# Altium PCB PCBUL.PcbDoc (part 1 of 2)
Units mil, origin at the board's own origin, x right, y up, seen from the top; angles counter-clockwise.
Board outline 2874.31 x 3937.01 mil, 2 copper layers (Top Layer, Bottom Layer); 201 components, 228 nets, 805 pads, 341 vias.
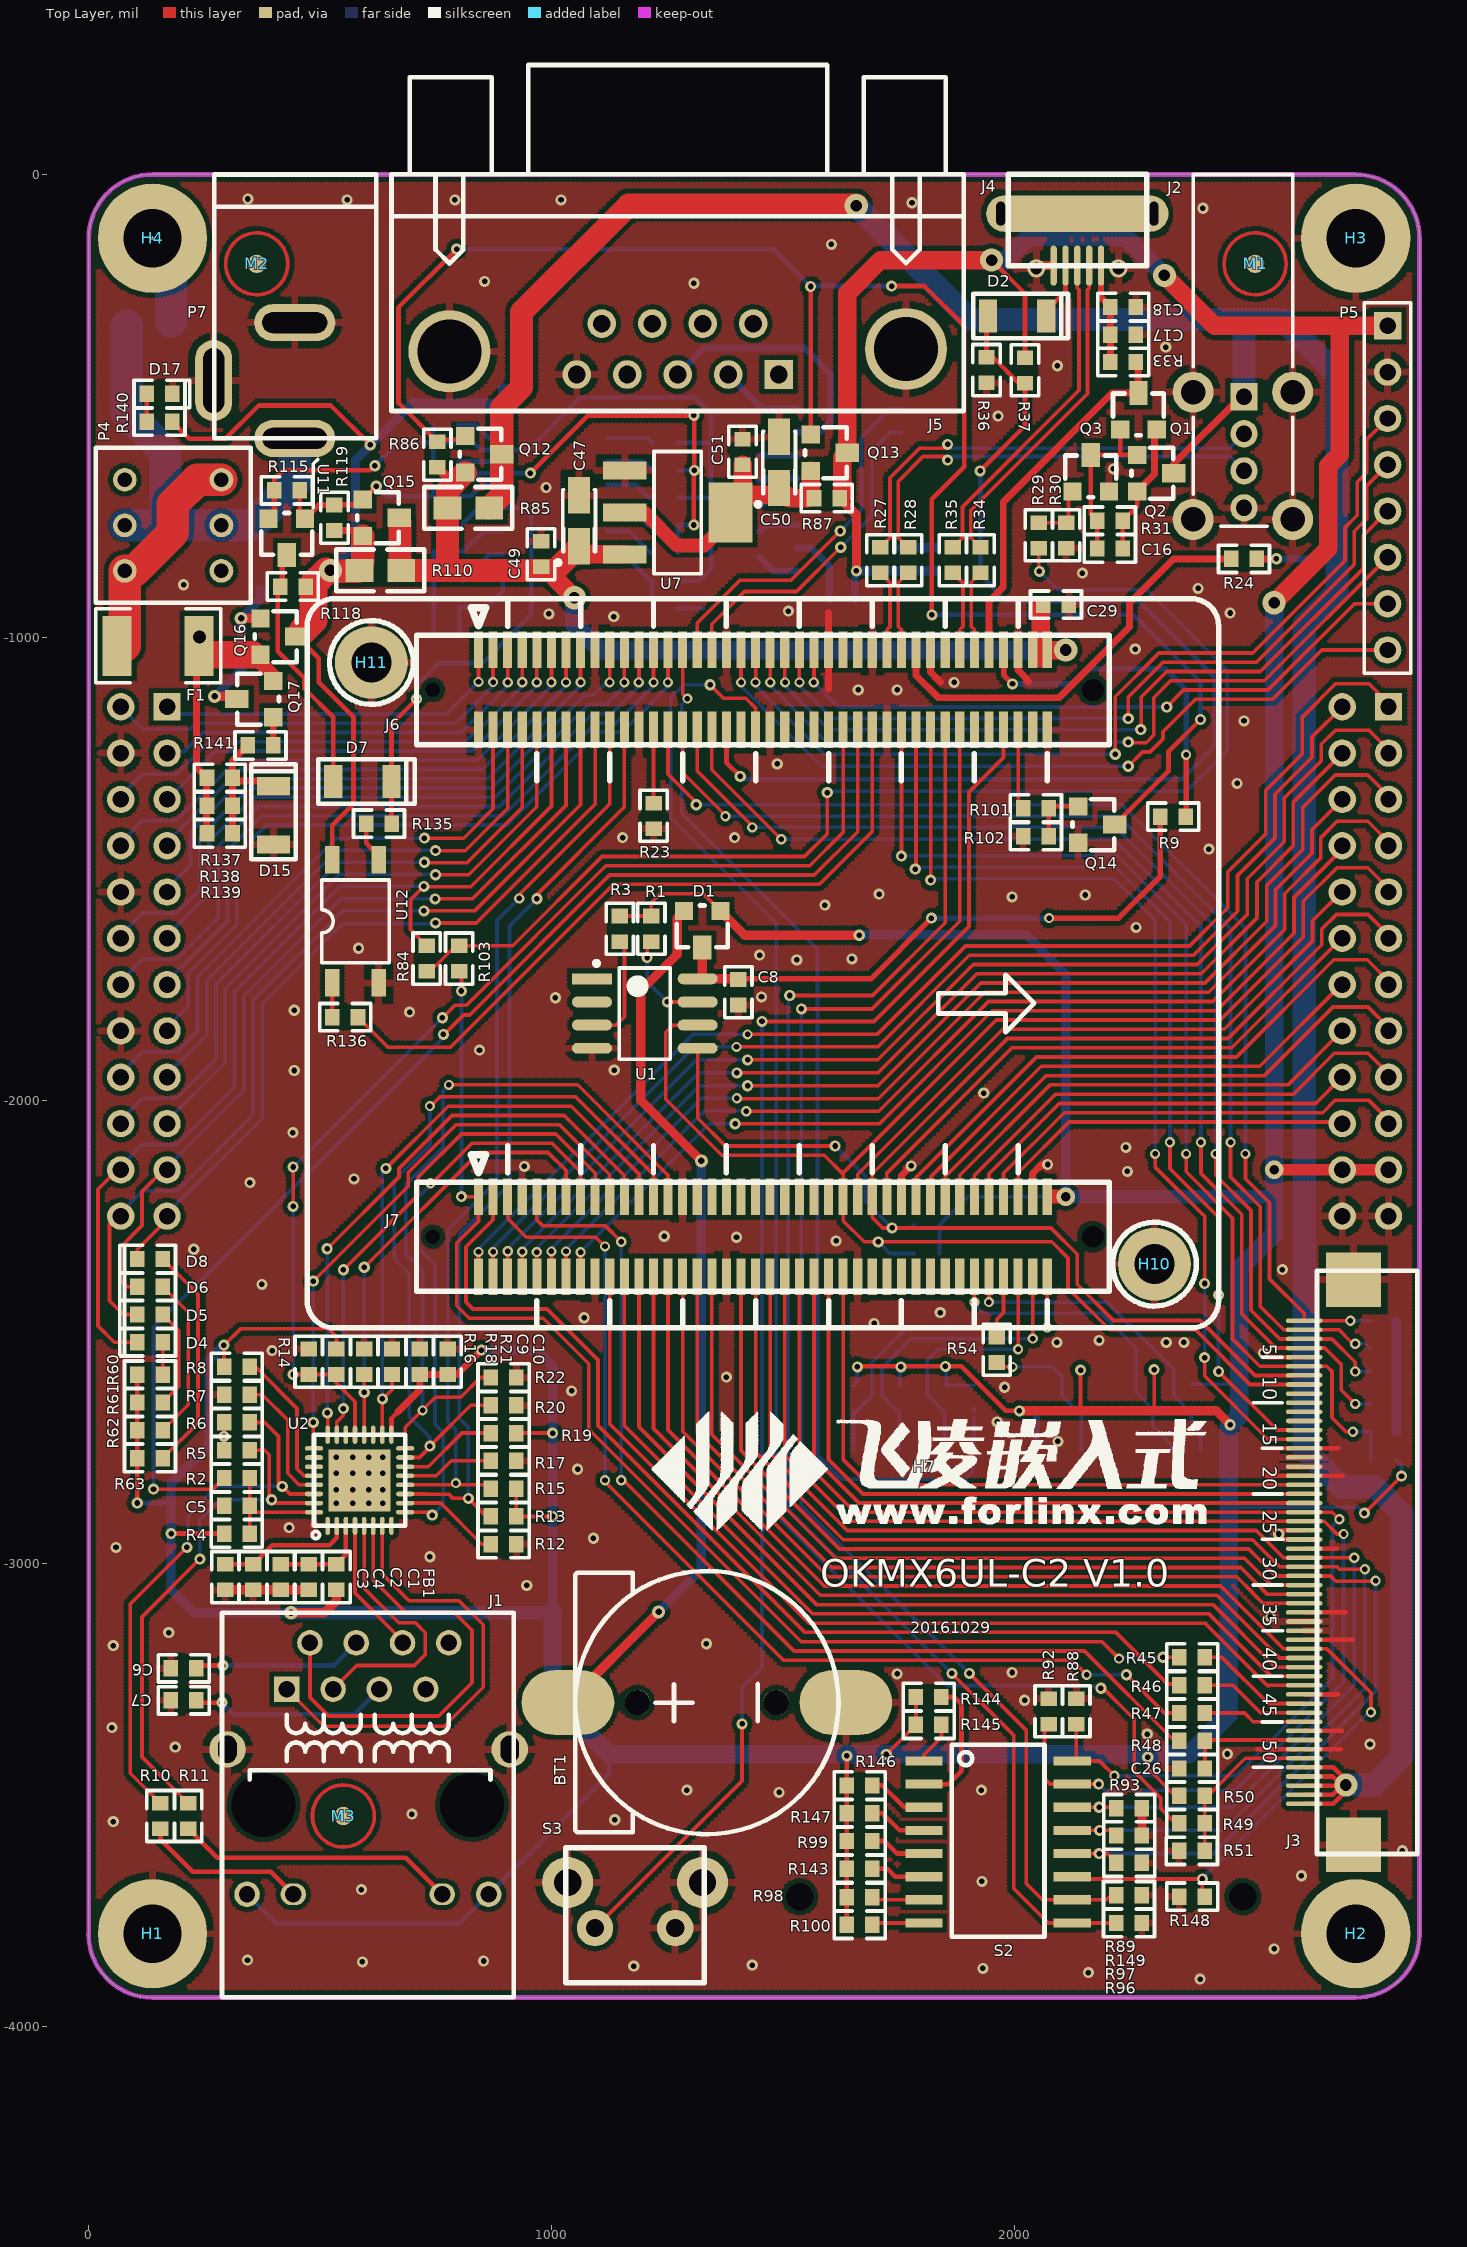
[diagram p0: Top Layer view]
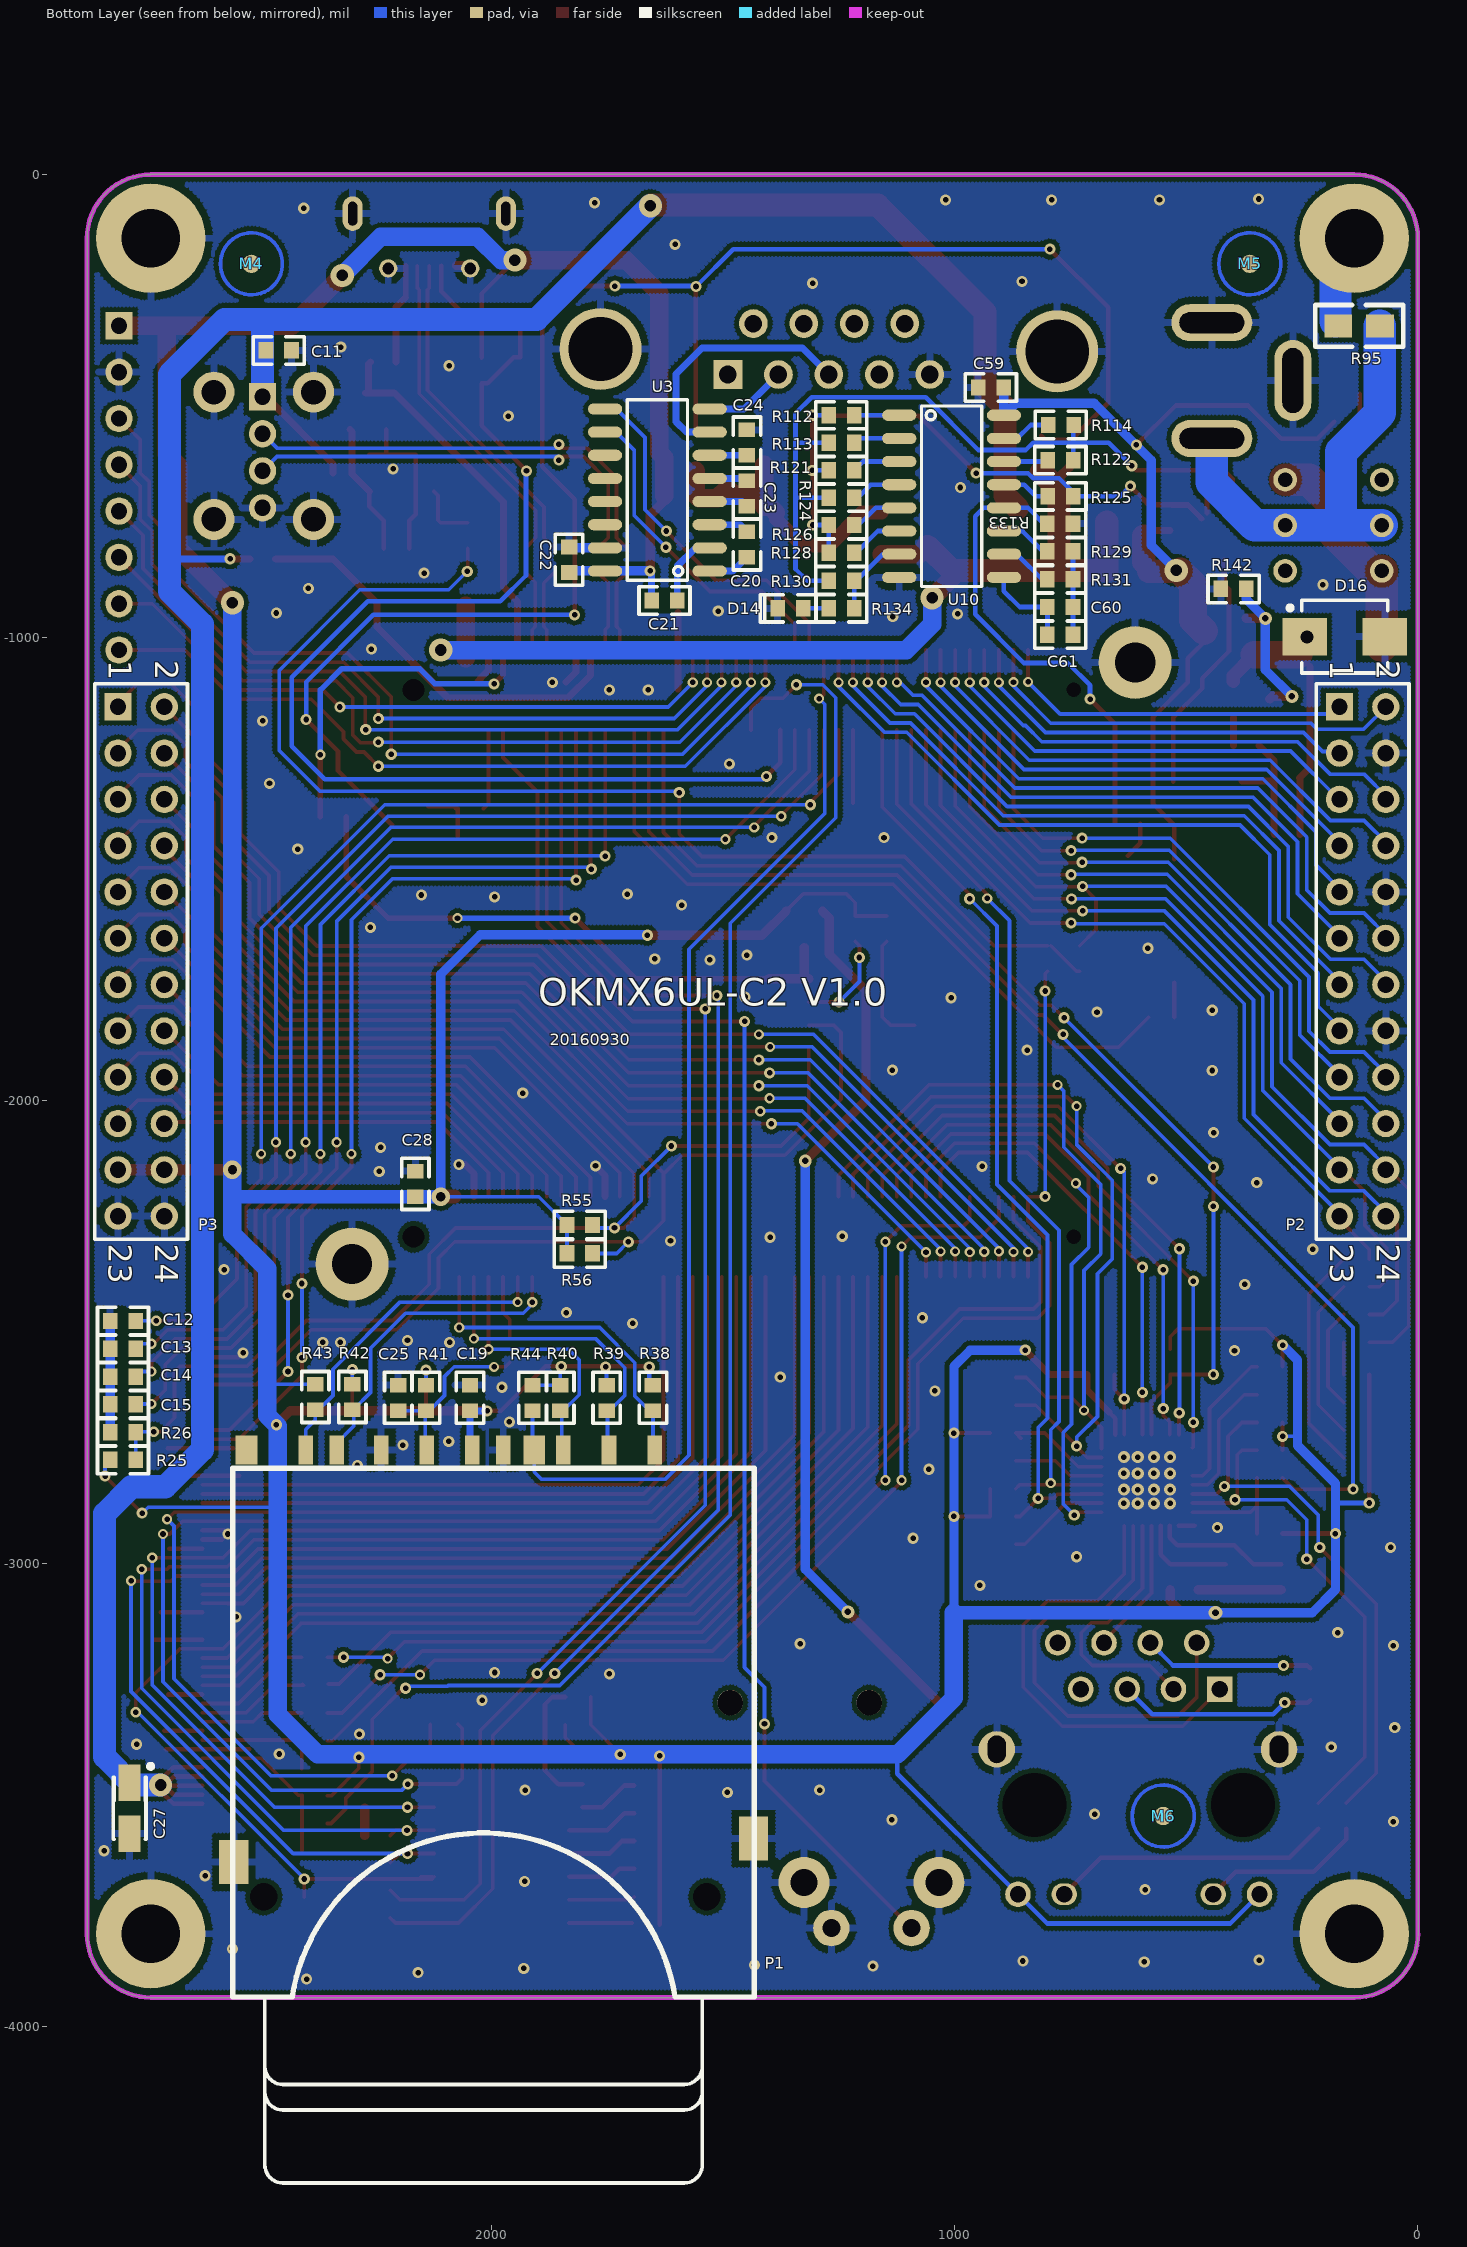
[diagram p1: Bottom Layer view, seen from below]

## Layer stack, top to bottom
Top Solder: solder mask 0.4, Solder Resist, Dk 3.5
Top Layer: signal copper 1.4
Dielectric 1: dielectric 12.6, FR-4, Dk 4.8
Bottom Layer: signal copper 1.4
Bottom Solder: solder mask 0.4, Solder Resist, Dk 3.5

## Board outline
-0.3,-3799.21 ccw(c137.5,-3799.21) 137,-3937 137,-3937.01 2736.22,-3937.01 ccw(c2736.22,-3799.21) 2874.02,-3799.71 2874.02,-138 ccw(c2736.22,-138) 2736.72,-0.21 2736.72,0 137.79,0 ccw(c137.79,-137.8) 0,-137.3

## Design rules (kind name [scope] priority, off if disabled: settings)
Clearance [All] p1: gap=1
ComponentClearance [All] p1: gap=0 collisioncheckmode=3 verticalgap=0 showdistances=FALSE
DiffPairsRouting [All] p1: maxlimit=10 minlimit=8 mostfreqgap=10 toplayer_minwidth=8 toplayer_maxwidth=15 toplayer_prefwidth=8 bottomlayer_minwidth=8 bottomlayer_maxwidth=15 bottomlayer_prefwidth=8 maxuncoupledlength=500
HoleSize [All] p1: absolutevalues=TRUE maxlimit=300 minlimit=1 maxpercent=80.000 minpercent=20.000
HoleToHoleClearance [All] p1: gap=0 allowstackedmicrovias=TRUE
MinimumSolderMaskSliver [All] p1: minsoldermaskwidth=0
PlaneConnect [All] p1: planeconnectstyle=Direct reliefexpansion=20 reliefentries=4 reliefconductorwidth=10 reliefairgap=10
PolygonConnect PolygonConnect_1 [ISVIA] p1: connectstyle=Direct reliefconductorwidth=10 reliefentries=4 polygonreliefangle="90 Angle" airgapwidth=10
PolygonConnect [All] p2: connectstyle=Relief reliefconductorwidth=15 reliefentries=4 polygonreliefangle="90 Angle" airgapwidth=15
RoutingVias [All] p1: holewidth=28 width=50 viastyle="Through Hole" minholewidth=1 minwidth=1 maxholewidth=250 maxwidth=300
SilkToBoardRegionClearance [All] p1 off:
SilkToSilkClearance [All] p1: silktosilkclearance=0
SilkToSolderMaskClearance [IsPad] p1: minsilkscreentomaskgap=0 clearancetoexposedcopper=TRUE
SolderMaskExpansion [ISVIA] p1: expansion=-40
Width [All] p1: maxlimit=150 minlimit=8 preferedwidth=8 minimp=50.000000 maximp=50.000000 favimp=50.000000
20 further rules are at their usual default settings.

## Classes and differential pairs
component class Sheet_UL: C28 C29 C47 C49 C50 C51 C59 C60 C61 D4 D5 D6 D7 D8 D14 D15 D16 D17 F1 H10 H11 J6 J7 P2 P3 P4 P5 P7 Q12 Q13 Q14 Q15 Q16 Q17 R54 R55 R56 R60 R61 R62 R63 R84 R85 R86 R87 R88 R89 R92 R93 R96 R97 R98 R99 R100 R101 R102 R103 R110 R112 R113 R114 R115 R118 R119 R121 R122 R124 R125 R126 R128 R129 R130 R131 R133 R134 R135 R136 R137 R138 R139 R140 R141 R142 R143 R144 R145 R146 R147 R148 R149 S2 S3 U7 U10 U11 U12
component class Sheet_TX: BT1 C1 C2 C3 C4 C5 C6 C7 C8 C9 C10 C11 C12 C13 C14 C15 C16 C17 C18 C19 C20 C21 C22 C23 C24 C25 C26 C27 D1 D2 FB1 H1 H2 H3 H4 H7 J1 J2 J3 J4 J5 M1 M2 M3 M4 M5 M6 P1 Q1 Q2 Q3 R1 R2 R3 R4 R5 R6 R7 R8 R9 R10 R11 R12 R13 R14 R15 R16 R17 R18 R19 R20 R21 R22 R23 R24 R25 R26 R27 R28 R29 R30 R31 R33 R34 R35 R36 R37 R38 R39 R40 R41 R42 R43 R44 R45 R46 R47 R48 R49 R50 R51 R95 U1 U2 U3
differential pair USBD: +USBD_P -USBD_N
differential pair USB_OTG2: +USB_OTG2_P -USB_OTG2_N
differential pair USB_OTG1: +USB_OTG1_P -USB_OTG1_N
differential pair D0: +D0_P -D0_N

## Components (designator, comment, footprint, x,y, rotation, side; value= is the part's Value field where it differs from the comment)
BT1 "BH1220_SMD" B1220 1035,-3300 r180 top
C1 "Cap" 0603 475,-3029 r90 top
C2 "Cap" 0603 415,-3029 r90 top
C3 "Cap" 0603 295,-3029 r90 top
C4 "Cap" 0603 355,-3029 r90 top
C5 "Cap" 0603 320,-2875 r0 top
C6 "Cap" 0603 205,-3226 r0 top
C7 "Cap" 0603 205,-3295 r0 top
C8 "100nF" 0603 1403,-1766 r270 top
C9 "Cap" 0603 715,-2564 r90 top
C10 "Cap" 0603 775,-2564 r90 top
C11 "C0603" 0603 2460,-380 r0 bottom
C12 "C0603" 0603 2796.4,-2476 r180 bottom
C13 "C0603" 0603 2796.4,-2536 r180 bottom
C14 "C0603" 0603 2796.4,-2596 r180 bottom
C15 "C0603" 0603 2796.4,-2656 r180 bottom
C16 "C0603" 0603 2205.41,-807.8 r180 top
C17 "C0603" 0603 2233.99,-346.15 r180 top
C18 "C0603" 0603 2233.99,-286.15 r180 top
C19 "100nF" 0603 2047,-2642 r90 bottom
C20 "C0603" 0603 1449,-799 r90 bottom
C21 "C0603" 0603 1627,-920 r180 bottom
C22 "C0603" 0603 1833,-832 r90 bottom
C23 "C0603" 0603 1449,-689 r90 bottom
C24 "C0603" 0603 1449,-579 r90 bottom
C25 "22pF" 0603 2202,-2642 r90 bottom
C26 "22pF" 0603 2383,-3442.4 r180 top
C27 "Cap Pol1" 3216A 2782,-3528 r270 bottom
C28 "Cap" 0603 2165,-2180 r270 bottom
C29 "Cap" 0603 2089,-929 r0 top
C47 "Cap Pol1" 3216A 1059,-748 r90 top
C49 "Cap" 0603 977,-820 r270 top
C50 "Cap Pol1" 3216A 1491,-622 r90 top
C51 "Cap" 0603 1412,-599 r90 top
C59 "Cap" 0603 922,-460 r180 bottom
C60 "Cap" 0603 772.44,-934 r180 bottom
C61 "Cap" 0603 772.44,-994 r180 bottom
D1 "BAT54C" SOT23 1325,-1669.56 r180 top
D2 "MBR0540" SOD-123 2005,-306 r0 top
D4 "BLUE" 0603_ 132.44,-2522 r180 top
D5 "BLUE" 0603_ 132.44,-2462 r180 top
D6 "BLUE" 0603_ 132.44,-2402 r180 top
D7 "LL4148/NC" 1206_ 591,-1311 r0 top
D8 "BLUE" 0603_ 132.44,-2342 r180 top
D14 "RED/NC" 0603_ 1355,-937 r0 bottom
D15 "MMSZ5231B" SOD-123 399,-1384 r90 top
D16 "SR54" SMB/DO-214AA 158,-998 r180 bottom
D17 "BLUE" 0603_ 153,-474 r0 top
F1 "Fuse 2" 1812 150,-1018 r0 top
FB1 "CZ" 0603 535,-3029 r270 top
H1 "hole" HOLE#1 52,-3658 r0 top
H2 "hole" HOLE#2 2619,-3657 r0 top
H3 "hole" HOLE#3 2647,20 r0 top
H4 "hole" HOLE#4 38,10 r0 top
H7 "hole" FLQRS 1800,-2800 r0 top
H10 "hole" HOLE_2 2301.51,-2353.16 r0 top
H11 "hole" HOLE_2 610.49,-1053.94 r0 top
J1 "HR911105A" RJ-45A12 342,-3714 r270 top
J2 "USB-A-F-W" USB-C 2495,-720 r90 top
J3 "LCD" FPC54_A 2625,-2475 r270 top
J4 "microUSB" MICRO_USB 2135,0 r180 top
J5 "DB9_MALE" DB9R/M 1490,-432 r180 top
J6 "LEFT_80PIN" CON_80 1456,-1113 r270 top
J7 "RIGHT_80PIN" CON_80 1456,-2294.1 r270 top
M1 "hole" mark 2519,-193 r0 top
M2 "hole" mark 363,-193 r0 top
M3 "hole" mark 550,-3545 r0 top
M4 "hole" mark 2519,-193 r180 bottom
M5 "hole" mark 363,-193 r180 bottom
M6 "hole" mark 550,-3545 r180 bottom
P1 "SDCARD_KMSD18" SD-CARD3 1996,-3237 r180 bottom
P2 "Header 12X2" HDR2X12 169.29,-1149.61 r270 bottom
P3 "Header 12X2" HDR2X12 2807.09,-1149.61 r270 bottom
P4 "Header 3X2A" ZSKG_8.5_8.5 15,-925 r90 top
P5 "Header 8" HDR1X8 2805,-327 r270 top
P7 "Header 3" JACK-2.5MM_B 445,-570 r0 top
Q1 "AO3415" SOT23 2267,-472 r0 top
Q2 "AO3415" SOT23 2343,-645 r270 top
Q3 "S8050" SOT23 2164,-606 r0 top
Q12 "AO3415" SOT23 892,-604 r270 top
Q13 "AO3415" SOT23 1638,-601 r270 top
Q14 "AO3416" SOT23 2215.56,-1404 r270 top
Q15 "AO3415/NC" SOT23 670.66,-741.37 r270 top
Q16 "AO3415" SOT23 450,-998 r270 top
Q17 "S9012" SOT23 320,-1133 r90 top
R1 "10K" 0603 1215,-1629 r270 top
R2 "Res1" 0603 320,-2815 r0 top
R3 "10K" 0603 1147,-1629 r270 top
R4 "Res1" 0603 320,-2935 r0 top
R5 "Res1" 0603 320,-2755 r0 top
R6 "Res1" 0603 320,-2695 r0 top
R7 "Res1" 0603 320,-2635 r0 top
R8 "Res1" 0603 320,-2575 r0 top
R9 "2.2K" 0603 2342,-1387 r180 top
R10 "Res1" 0603 155,-3545 r270 top
R11 "Res1" 0603 215,-3545 r270 top
R12 "Res1" 0603 896,-2958 r0 top
R13 "Res1" 0603 896,-2898 r0 top
R14 "Res1" 0603 475,-2564 r270 top
R15 "Res1" 0603 896,-2838 r0 top
R16 "Res1" 0603 535,-2564 r270 top
R17 "Res1" 0603 896,-2778 r0 top
R18 "Res1" 0603 595,-2564 r270 top
R19 "Res1" 0603 896,-2718 r0 top
R20 "Res1" 0603 896,-2658 r0 top
R21 "Res1" 0603 655,-2564 r270 top
R22 "Res1" 0603 896,-2598 r0 top
R23 "Res1" 0603 1220,-1385 r90 top
R24 "Res1" 0603 2495,-830 r180 top
R25 "10K" 0603 2796.4,-2776 r180 bottom
R26 "10K" 0603 2796.4,-2716 r180 bottom
R27 "0R" 0603 1709.6,-833 r90 top
R28 "0R" 0603 1769.6,-833 r90 top
R29 "Res1" 0603 2052,-779.44 r270 top
R30 "Res1" 0603 2111,-779.44 r270 top
R31 "Res1" 0603 2205.41,-747.8 r0 top
R33 "Res1" 0603 2234,-405 r180 top
R34 "22R" 0603 1926,-833 r90 top
R35 "22R" 0603 1866,-833 r90 top
R36 "120K" 0603 1938.8,-422.41 r90 top
R37 "10K" 0603 2022,-423 r270 top
R38 "10K" 0603 1652,-2642 r270 bottom
R39 "10K" 0603 1752,-2642 r270 bottom
R40 "10K" 0603 1852,-2642 r270 bottom
R41 "10K" 0603 2142,-2642 r270 bottom
R42 "10K" 0603 2301,-2640 r270 bottom
R43 "10K" 0603 2381,-2640 r270 bottom
R44 "10K" 0603 1912,-2642 r270 bottom
R45 "22R" 0603 2383,-3202.4 r0 top
R46 "22R" 0603 2383,-3262.4 r0 top
R47 "22R" 0603 2383,-3322.4 r0 top
R48 "22R" 0603 2383,-3382.4 r0 top
R49 "22R" 0603 2383,-3561 r0 top
R50 "10K" 0603 2383,-3501 r0 top
R51 "10K" 0603 2382.44,-3620 r0 top
R54 "Res1" 0603 1961,-2538 r270 top
R55 "Res1" 0603 1810,-2268.6 r0 bottom
R56 "Res1" 0603 1810,-2330 r0 bottom
R60 "Res1" 0603 132.44,-2592 r180 top
R61 "Res1" 0603 132.44,-2652 r180 top
R62 "Res1" 0603 132.44,-2712 r180 top
R63 "Res1" 0603 132.44,-2772 r180 top
R84 "Res1" 0603 730,-1693.32 r270 top
R85 "Res1" 0805 820,-720 r180 top
R86 "Res1" 0603 753,-605 r270 top
R87 "Res1" 0603 1594,-699 r0 top
R88 "Res1" 0603 2133,-3319 r90 top
R89 "Res1" 0603 2247,-3587 r0 top
R92 "Res1" 0603 2073,-3319 r90 top
R93 "Res1" 0603 2247,-3528 r0 top
R95 "10K" 0805 127,-327 r180 bottom
R96 "Res1" 0603 2246.56,-3776 r180 top
R97 "Res1" 0603 2246.56,-3716 r180 top
R98 "Res1" 0603 1665,-3720 r0 top
R99 "Res1" 0603 1665,-3599 r0 top
R100 "Res1" 0603 1665,-3780 r0 top
R101 "Res1" 0603 2045.56,-1369 r180 top
R102 "Res1" 0603 2045.56,-1429 r0 top
R103 "Res1" 0603 800,-1693.32 r270 top
R110 "Res1" 0805 630,-855 r180 top
R112 "Res1" 0603 1245,-520 r180 bottom
R113 "Res1" 0603 1245,-579 r180 bottom
R114 "Res1" 0603 771,-541 r180 bottom
R115 "Res1" 0603 428,-682 r0 top
R118 "Res1" 0603 441,-890 r0 top
R119 "Res1" 0603 530.66,-741.37 r270 top
R121 "Res1" 0603 1245,-639 r180 bottom
R122 "Res1" 0603 772,-617 r180 bottom
R124 "Res1" 0603 1245,-698 r180 bottom
R125 "Res1" 0603 772,-695 r180 bottom
R126 "Res1" 0603 1245,-757 r180 bottom
R128 "Res1" 0603 1245,-817 r180 bottom
R129 "Res1" 0603 772.44,-814 r180 bottom
R130 "Res1" 0603 1245,-877 r180 bottom
R131 "Res1" 0603 772.44,-874 r180 bottom
R133 "Res1" 0603 772.44,-754 r180 bottom
R134 "Res1" 0603 1245,-937 r180 bottom
R135 "Res1" 0603 627,-1402 r0 top
R136 "Res1" 0603 554,-1820 r180 top
R137 "Res1" 0603 283,-1303 r0 top
R138 "Res1" 0603 283,-1363 r0 top
R139 "Res1" 0603 283,-1423 r0 top
R140 "Res1" 0603 153,-534 r0 top
R141 "Res1" 0603 371,-1233 r180 top
R142 "Res1" 0603 398,-895 r0 bottom
R143 "Res1" 0603 1665,-3659 r0 top
R144 "Res1" 0603 1814,-3288 r0 top
R145 "Res1" 0603 1814,-3348 r0 top
R146 "Res1" 0603 1665,-3479 r0 top
R147 "Res1" 0603 1665,-3539 r0 top
R148 "Res1" 0603 2383,-3719 r180 top
R149 "Res1" 0603 2247,-3646 r0 top
S2 "SW DIP-8" SMD_8 1964,-3501 r0 top (schematic designator S?)
S3 "RESET" SW_6-6 1180,-3905 r0 top
U1 "RX8010" SOIC-8N 1201,-1812 r0 top
U2 "KSZ8081" QFN-32 585,-2820 r0 top
U3 "MAX3232" SO-16 1529.4,-856.4 r0 bottom
U7 "LM1117-3.3" SOT-223 1276,-734 r270 top
U10 "CD4060B/NC" SO-16 1120,-520 r180 bottom
U11 "BAT54A/NC" SOT23 428,-822 r180 top
U12 "Opt/NC" SO-4 576,-1613 r90 top

## Footprints (in the part's own frame and the unit in brackets; to place one, negate y for a bottom-side part, rotate by r counter-clockwise, add the part's x,y. Pads: shape width x height; smd on the part's side, far side on the other; paste and mask are expansions set on the pad)
0603 [mm]
  rect 0.8x0.9 smd: 1(-0.7,0) 2(0.7,0)
  silkscreen extent -1.4,-0.75 1.4,0.75, body extent -0.93,-0.53 0.82,0.42, height 1.3
0603_ [mm]
  rect 0.8x0.9 smd: 1(-0.7,0) 2(0.7,0)
  silkscreen extent -1.4,-0.75 1.65,0.75, body extent -0.93,-0.53 0.82,0.42, height 1.3
0805 [mil]
  rect 60x50 smd: 1(-45,0) 2(45,0)
  silkscreen extent -95,-45 95,45
1206_ [mm]
  rect 1x1.8 smd: 1(-1.6,0) 2(1.6,0)
  silkscreen extent -2.41,-1.22 2.87,1.22
1812 [mm]
  rect 1.6x3.3 smd: 1(-2.25,0) 2(2.25,0)
  silkscreen extent -3.43,-2.03 3.43,2.03, body extent -2.25,-1.6 2.25,1.6, height 1.3
3216A [mm]
  rect 2x1.2 smd: 1(-1.4,0) 2(1.4,0)
  silkscreen extent -2.42,-0.9 1.7,1.28
B1220 [mil]
  oval 200x140 smd: 1(0,0) 2(-600,0)
  round 55.12 hole 55.12 unplated: 3(-150,0) 4(-450,0)
  silkscreen extent -584,-284 -16,284
CON_80 [mm]
  rect 2x0.5 smd: 1(-2.2,-15.6) 2(2.2,-15.6) 3(-2.2,-14.8) 4(2.2,-14.8) 5(-2.2,-14) 6(2.2,-14) 7(-2.2,-13.2) 8(2.2,-13.2) 9(-2.2,-12.4) 10(2.2,-12.4) 11(-2.2,-11.6) 12(2.2,-11.6) 13(-2.2,-10.8) 14(2.2,-10.8) 15(-2.2,-10) 16(2.2,-10) 17(-2.2,-9.2) 18(2.2,-9.2) 19(-2.2,-8.4) 20(2.2,-8.4) 21(-2.2,-7.6) 22(2.2,-7.6) 23(-2.2,-6.8) 24(2.2,-6.8) 25(-2.2,-6) 26(2.2,-6) 27(-2.2,-5.2) 28(2.2,-5.2) 29(-2.2,-4.4) 30(2.2,-4.4) 31(-2.2,-3.6) 32(2.2,-3.6) 33(-2.2,-2.8) 34(2.2,-2.8) 35(-2.2,-2) 36(2.2,-2) 37(-2.2,-1.2) 38(2.2,-1.2) 39(-2.2,-0.4) 40(2.2,-0.4) 41(-2.2,0.4) 42(2.2,0.4) 43(-2.2,1.2) 44(2.2,1.2) 45(-2.2,2) 46(2.2,2) 47(-2.2,2.8) 48(2.2,2.8) 49(-2.2,3.6) 50(2.2,3.6) 51(-2.2,4.4) 52(2.2,4.4) 53(-2.2,5.2) 54(2.2,5.2) 55(-2.2,6) 56(2.2,6) 57(-2.2,6.8) 58(2.2,6.8) 59(-2.2,7.6) 60(2.2,7.6) 61(-2.2,8.4) 62(2.2,8.4) 63(-2.2,9.2) 64(2.2,9.2) 65(-2.2,10) 66(2.2,10) 67(-2.2,10.8) 68(2.2,10.8) 69(-2.2,11.6) 70(2.2,11.6) 71(-2.2,12.4) 72(2.2,12.4) 73(-2.2,13.2) 74(2.2,13.2) 75(-2.2,14) 76(2.2,14) 77(-2.2,14.8) 78(2.2,14.8) 79(-2.2,15.6) 80(2.2,15.6)
  round 1 hole 1.2 unplated: 81(0,18.1)
  round 0.5 hole 0.8 unplated: 82(0,-18.1)
  silkscreen extent -5,-19 5,19
DB9R/M [mil]
  rect 62x62 hole 38: 1(0,0)
  round 62 hole 38: 2(109,0) 3(218,0) 4(327,0) 5(436,0) 6(55,-110) 7(164,-110) 8(273,-110) 9(382,-110)
  round 177.16 hole 137.79: 10(711,-50) 11(-275,-55)
  silkscreen extent -400,-668 836,79
FLQRS [mil]
  silkscreen extent -584,-127 613,128
FPC54_A [mm]
  oval 0.25x2 smd: 1(0.009,-0.002) 2(0.509,-0.002) 3(1.009,-0.002) 4(1.509,-0.002) 5(2.009,-0.002) 6(2.509,-0.002) 7(3.009,-0.002) 8(3.509,-0.002) 9(4.009,-0.002) 10(4.509,-0.002) 11(5.009,-0.002) 12(5.509,-0.002) 13(6.009,-0.002) 14(6.509,-0.002) 15(7.009,-0.002) 16(7.509,-0.002) 17(8.009,-0.002) 18(8.509,-0.002) 19(9.009,-0.002) 20(9.509,-0.002) 21(10.009,-0.002) 22(10.509,-0.002) 23(11.009,-0.002) 24(11.509,-0.002) 25(12.009,-0.002) 26(12.509,-0.002) 27(13.009,-0.002) 28(13.509,-0.002) 29(14.009,-0.002) 30(14.509,-0.002) 31(15.009,-0.002) 32(15.509,-0.002) 33(16.009,-0.002) 34(16.509,-0.002) 35(17.009,-0.002) 36(17.509,-0.002) 37(18.009,-0.002) 38(18.509,-0.002) 39(19.009,-0.002) 40(19.509,-0.002) 41(20.009,-0.002) 42(20.509,-0.002) 43(21.009,-0.002) 44(21.509,-0.002) 45(22.009,-0.002) 46(22.509,-0.002) 47(23.009,-0.002) 48(23.509,-0.002) 49(24.009,-0.002) 50(24.509,-0.002) 51(25.009,-0.002) 52(25.509,-0.002) 53(26.009,-0.002) 54(26.509,-0.002)
  rect 3x3 smd: 55(-2.241,2.698) 56(28.759,2.698)
  silkscreen extent -2.74,-2.8 29.26,6.2
HDR1X8 [mm] "Connector; Header; 8 Position"
  rect 1.5x1.5 hole 0.9: 1(0,0)
  round 1.5 hole 0.9: 2(2.54,0) 3(5.08,0) 4(7.62,0) 5(10.16,0) 6(12.7,0) 7(15.24,0) 8(17.78,0)
  silkscreen extent -1.27,-1.27 19.05,1.27
HDR2X12 [mm] "Connector; Header; 12x2 Position"
  rect 1.5x1.5 hole 0.9: 1(0,0)
  round 1.5 hole 0.9: 2(0,2.54) 3(2.54,0) 4(2.54,2.54) 5(5.08,0) 6(5.08,2.54) 7(7.62,0) 8(7.62,2.54) 9(10.16,0) 10(10.16,2.54) 11(12.7,0) 12(12.7,2.54) 13(15.24,0) 14(15.24,2.54) 15(17.78,0) 16(17.78,2.54) 17(20.32,0) 18(20.32,2.54) 19(22.86,0) 20(22.86,2.54) 21(25.4,0) 22(25.4,2.54) 23(27.94,0) 24(27.94,2.54)
  silkscreen extent -1.27,-1.27 29.21,3.81
HOLE#1 [mm]
  round 6 hole 3.2: 0(2.179,-3.587)
HOLE#2 [mm]
  round 6 hole 3.2: 0(2.977,-3.612)
HOLE#3 [mm]
  round 6 hole 3.2: 0(2.266,-4.008)
HOLE#4 [mm]
  round 6 hole 3.2: 0(2.535,-3.754)
HOLE_2 [mm]
  round 4 hole 2.2: 1(0,0)
  silkscreen extent -2.3,-2.3 2.3,2.3
JACK-2.5MM_B [mil]
  oval 175x80 hole 45 slot 140 at 0 deg: 1(0,0) 2(0,250)
  oval 80x175 hole 45 slot 140 at 90 deg: 3(-175,125)
  silkscreen extent -174,0 176,570
mark [mm]
  round 1 smd mask+1: 0(0,0)
  Top Layer circle w0.2: c0,0 r1.7
MICRO_USB [mm]
  oval 0.35x2.2 smd: 1(-1.3,5) 2(-0.65,5) 3(0,5) 4(0.65,5) 5(1.3,5)
  round 1 hole 0.65: 6(-2.25,5.15) 7(2.25,5.15)
  oval 1.1x1.9 hole 0.5 slot 1.3 at 90 deg: 8(-4.2,2.15) 9(4.2,2.15)
  oval 10x2 smd: 10(0,2.15)
  silkscreen extent -3.8,0 3.8,5
QFN-32 [mm]
  oval 0.25x1 smd: 1(-1.75,-2.5) 2(-1.25,-2.5) 3(-0.75,-2.5) 4(-0.25,-2.5) 5(0.25,-2.5) 6(0.75,-2.5) 7(1.25,-2.5) 8(1.75,-2.5) 17(1.75,2.5) 18(1.25,2.5) 19(0.75,2.5) 20(0.25,2.5) 21(-0.25,2.5) 22(-0.75,2.5) 23(-1.25,2.5) 24(-1.75,2.5)
  oval 1x0.25 smd: 9(2.5,-1.75) 10(2.5,-1.25) 11(2.5,-0.75) 12(2.5,-0.25) 13(2.5,0.25) 14(2.5,0.75) 15(2.5,1.25) 16(2.5,1.75) 25(-2.5,1.75) 26(-2.5,1.25) 27(-2.5,0.75) 28(-2.5,0.25) 29(-2.5,-0.25) 30(-2.5,-0.75) 31(-2.5,-1.25) 32(-2.5,-1.75)
  rect 3.4x3.4 smd: 33(0,0)
  silkscreen extent -2.6,-3.2 2.5,2.5
RJ-45A12 [mm]
  rect 1.4x1.4 hole 0.9: 1(-11.25,2.18)
  round 1.4 hole 0.9: 2(-13.79,3.45) 3(-11.25,4.72) 4(-13.79,5.99) 5(-11.25,7.26) 6(-13.79,8.53) 7(-11.25,9.8) 8(-13.79,11.07) 9(0,0) 12(0,13.25)
  oval 1.2x1.4 hole 0.9: 10(0,2.54) 11(0,10.71)
  round 2 hole 1 slot 1.5 at 0 deg: 13(-7.95,14.41) 14(-7.95,-1.07)
  round 0 hole 3.5 unplated: 16(-4.9,12.34) 16(-4.9,0.91)
  silkscreen extent -15.44,-1.38 5.64,14.63
SD-CARD3 [mm]
  rect 0.8x1.6 smd: 1(6.33,12.25) 2(3.83,12.25) 3(0.53,12.25) 4(-1.17,12.25) 5(-3.67,12.25) 6(-6.17,12.25) 7(-8.6,12.25) 8(-10.3,12.25) 9(8.83,12.25)
  rect 1.2x1.6 smd: 10(-13.55,12.25) 11(2.23,12.25)
  rect 1.6x2.4 smd: 12(-14.25,-10.35) 13(14.25,-9.05)
  round 1 hole 1.5: 14(-12.6,-12.25) 15(11.7,-12.25)
  silkscreen extent -14.3,-27.95 14.3,11.25
SMB/DO-214AA [mm]
  rect 2.45x2.05 smd: 1(2.2,0) 2(-2.2,0)
  silkscreen extent -3.13,-2 2.35,2
SMD_8 [mil]
  rect 80x20 smd: 1(-160,75) 2(-160,25) 3(-160,-25) 4(-160,-75) 5(-160,-125) 6(-160,-175) 7(-160,-225) 8(-160,-275) 9(160,-275) 10(160,-225) 11(160,-175) 12(160,-125) 13(160,-75) 14(160,-25) 15(160,25) 16(160,75)
  silkscreen extent -100,-305 100,110
SO-4 [mm]
  rect 1.5x0.8 smd: 1(-3.373,1.27) 2(-3.373,-1.27) 3(3.373,-1.27) 4(3.373,1.27)
  silkscreen extent -2.28,-1.85 2.27,1.85
SO-16 [mil]
  oval 74x24 smd: 1(0,0) 2(0,-50) 3(0,-100) 4(0,-150) 5(0,-200) 6(0,-250) 7(0,-300) 8(0,-350) 9(226,-350) 10(226,-300) 11(226,-250) 12(226,-200) 13(226,-150) 14(226,-100) 15(226,-50) 16(226,0)
  silkscreen extent 48,-370 178,20
SOD-123 [mm]
  rect 1x1.8 smd: 1(-1.6,0) 2(1.6,0)
  silkscreen extent -2.41,-1.22 2.79,1.22
SOIC-8N [mm]
  rect 2.2x0.6 smd: 1(-2.9,1.905)
  oval 2.2x0.6 smd: 2(-2.9,0.635) 3(-2.9,-0.635) 4(-2.9,-1.905) 5(2.9,-1.905) 6(2.9,-0.635) 7(2.9,0.635) 8(2.9,1.905)
  silkscreen extent -2.77,-2.5 1.4,2.88, body extent -1.99,-2.5 1.99,2.5, height 1.75
SOT23 [mm]
  rect 1x1 smd: 1(-1,-2) 2(1,-2)
  rect 1x1.3 smd: 3(0,0)
  silkscreen extent -1.4,-2.31 1.4,-0.03
SOT-223 [mm] "SOT223"
  rect 1x2.4 smd: 1(-2.4,-3) 2(-0.1,-3) 3(2.2,-3)
  rect 3.3x2.4 smd: 4(-0.1,2.8)
  silkscreen extent -3.45,-1.4 3.25,1.2
SW_6-6 [mm]
  round 2 hole 1: 1(-2.2,3) 2(2.2,3)
  round 2.8 hole 1.5: 3(-3.7,5.5) 4(3.7,5.5)
  silkscreen extent -3.8,0 3.8,7.4
USB-C [mm]
  rect 1.5x1.5 hole 0.9: 1(6.096,0)
  round 1.5 hole 0.9: 2(4.064,0) 3(2.032,0) 4(0,0)
  round 2.25 hole 1.35: 5(6.35,2.794) 6(-0.635,2.794) 7(-0.635,-2.667) 8(6.35,-2.667)
  silkscreen extent -1.02,-2.67 18.29,2.79
ZSKG_8.5_8.5 [mm]
  round 1.3 hole 0.8: 1(6.75,-1.6) 2(4.25,-1.6) 3(1.75,-1.6) 4(1.75,-6.9) 5(4.25,-6.9) 6(6.75,-6.9)
  silkscreen extent 0,-8.5 8.5,0

## Part data
BT1: library part Battery
C1 C2 C3 C4 C5 C6 C7 C9 C10 C28 C29 C49 C51 C59 C60 C61: "Capacitor"
C8 C19 C25 C26: library part CAP_1
C11 C12 C13 C14 C15 C16 C17 C18: library part "Cap Semi", "Capacitor (Semiconductor SIM Model)"
C20 C21 C22 C23 C24: library part Cap, "Capacitor"
C27 C47 C50: "Polarized Capacitor (Radial)"
D1: "SOT23-3_D"
D2 D7 D16: library part Diode, "Default Diode"
D4 D5 D6 D8 D14 D17: library part LED0, "Typical INFRARED GaAs LED"
D15: library part "D Zener", "Zener Diode"
F1: "Fuse"
FB1: "Inductor"
J3: library part FPC54
J4: library part miniUSB
J5: library part "D Connector 9", "Receptacle Assembly, 9 Position, Right Angle"
P2 P3: "Header, 12-Pin, Dual row"
P4: "Header, 3-Pin, Dual row"
P5: "Header, 8-Pin"
P7: "Header, 3-Pin"
Q1 Q2 Q12 Q13 Q15 Q16: library part MOSFET-P_1, "P-Channel MOSFET"
Q3: library part NPN, "NPN Transistor"
Q14: library part MOSFET-P_1, "N-Channel MOSFET"
Q17: library part PNP, "PNP Transistor"
R1 R3 R9 R25 R26 R27 R28 R34 R35 R36 R37 R38 R39 R40 R41 R42 R43 R44 R45 R46 R47 R48 R49 R50 R51 R95: library part Res1, "R0603"
R2 R4 R5 R6 R7 R8 R10 R11 R12 R13 R14 R15 R16 R17 R18 R19 R20 R21 R22 R23 R24 R29 R30 R31 R33 R54 R55 R56 R60 R61 R62 R63 R84 R85 R86 R87 R88 R89 R92 R93 R96 R97 R98 R99 R100 R101 R102 R103 R110 R112 R113 R114 R115 R118 R119 R121 R122 R124 R125 R126 R128 R129 R130 R131 R133 R134 R135 R136 R137 R138 R139 R140 R141 R142 R143 R144 R145 R146 R147 R148 R149: "Resistor"
S2: "DIP Switch, 8 Position, SPST"
S3: library part SW-PB-4
U1: library part DS1337
U2: library part KSZ8081RNB
U3: library part MAX202E, "TI SOIC16"
U7: library part "Volt Reg", "Voltage Regulator"
U10: library part CD4060B
U11: library part BAT54A
U12: library part Optoisolator1, "4-Pin Phototransistor Optocoupler"

## Via types
v1: diameter 24, hole 12, Top Layer to Bottom Layer, 235 vias
v2: diameter 22, hole 12, Top Layer to Bottom Layer, 74 vias
v3: diameter 25.98, hole 11.81, Top Layer to Bottom Layer, 16 vias
v4: diameter 50, hole 25, Top Layer to Bottom Layer, 8 vias
v5: diameter 28, hole 14, Top Layer to Bottom Layer, 4 vias
v6: diameter 40, hole 20, Top Layer to Bottom Layer, 2 vias
v7: diameter 30, hole 15, Top Layer to Bottom Layer, 1 vias
v8: diameter 50, hole 28, Top Layer to Bottom Layer, 1 vias

## Nets (pads, with @x,y where several pads share a name; then routed paths per layer and width w, separated by ;. In a path a pad name is that pad's centre, name@x,y a point inside that pad or via, vN(x,y) a via of type N, cw(c..) or ccw(c..) an arc to the next point about the centre after c; other vN are vias at no path point)
+5V: C59.2 Q15.2 Q16.3 R110.2 R118.2 R119.2 R140.2 U10.16 U12.4 | length 2094.9
  Top Layer w10: R140.2@180.56,-534 217.56,-571 295,-571 367,-499 523,-499 v1(608,-584) ; Q16.3@450,-998 497,-1045 497,-1097 572,-1172 572,-1359 526,-1405 U12.4@526,-1479.2
  Top Layer w15: R119.2@535.66,-768.93 580.11,-768.93 Q15.2@591.92,-780.74
  Top Layer w50: v4@513,-857 R110.2@582,-857 ; R110.2@591.92,-837.08 Q15.2@591.92,-780.74
  Top Layer w60: Q16.3@462,-986 485.5,-962.5 485.5,-884.5 v4@513,-857
  Bottom Layer w20: v4(522,-855) 576,-801 576,-617 699,-494 868,-494 U10.16@894,-520 ; U10.16@894.44,-519.56 C59.2@894.44,-460
ACC_INT: J3.14 J6.64 | length 2150.2
  Top Layer w8: v1@1818.2,-1524 J6.64@1818.2,-1199.61 ; v2(2303,-2115) 2303,-2143.43 2410,-2250.43 v1(2410,-2395) ; v1(2410,-2555) 2410,-2595 2546.25,-2731.25 J3.14@2624.91,-2731.25
  Bottom Layer w8: v1(1818,-1524) 1818,-1521 2214.57,-1521 2303,-1609.43 v2(2303,-2115) ; v1(2410,-2555) v1(2410,-2395)
BLT_PWM: J6.40 R49.1 | length 3350.6
  Top Layer w8: v1(1342,-1102) 1371,-1131 1419,-1131 1440.25,-1152.25 J6.40@1440.25,-1199.61 ; v1(2186,-3269) 2188.54,-3266.46 2258,-3335.91 2258,-3449 2315,-3506 2315,-3529 2347,-3561 R49.1@2355.44,-3561
  Bottom Layer w8: v1(1342,-1102) 1285,-1102 1257,-1130 1257,-1389 1485,-1617 1485,-2895 1853,-3263 2094,-3263 2096,-3265 2182,-3265 v1(2186,-3269)
CHG: J6.46
CLR: J6.56 R136.1 | length 1549.9
  Top Layer w8: R136.1@581.56,-1820 646.56,-1885 781.28,-1885 1133.28,-1533 1578,-1533 1692.22,-1418.78 J6.56@1692.22,-1199.61
CSI_DATA0: J7.61 P3.13 | length 1281
  Top Layer w8: J7.61@1786.71,-2207.49 1786.71,-2166.29 2046.94,-1906.06 2478.94,-1906.06 2689,-1696 2760.96,-1696 P3.13@2811.02,-1746.06
CSI_DATA1: J7.63 P3.14 | length 1106.7
  Top Layer w8: J7.63@1818.2,-2207.49 1818.2,-2164.8 2056.94,-1926.06 2528.78,-1926.06 P3.14@2708.78,-1746.06
CSI_DATA2: J7.65 P3.15 | length 1176.9
  Top Layer w8: J7.65@1849.7,-2207.49 1849.7,-2163 1850.91,-2163 2067.85,-1946.06 2538.94,-1946.06 2687,-1798 2762.96,-1798 P3.15@2811.02,-1846.06
CSI_DATA3: J7.67 P3.16 | length 1005.5
  Top Layer w8: J7.67@1881.2,-2207.49 1881.2,-2161 2076.13,-1966.06 2589.78,-1966.06 P3.16@2709.78,-1846.06
CSI_DATA4: J7.69 P3.17 | length 1073.7
  Top Layer w8: J7.69@1912.69,-2207.49 1912.69,-2161 1912.9,-2161 2087.84,-1986.06 2601.94,-1986.06 2690,-1898 2762.96,-1898 P3.17@2811.02,-1946.06
CSI_DATA5: J7.71 P3.18 | length 902.9
  Top Layer w8: J7.71@1944.19,-2207.49 1944.19,-2158 2096.13,-2006.06 2649.78,-2006.06 P3.18@2709.78,-1946.06
CSI_DATA6: J7.73 P3.19 | length 970.8
  Top Layer w8: J7.73@1975.68,-2207.49 1975.68,-2157 2106.62,-2026.06 2665.18,-2026.06 2692.24,-1999 2763.96,-1999 P3.19@2811.02,-2046.06
CSI_DATA7: J7.75 P3.20 | length 801
  Top Layer w8: J7.75@2007.18,-2207.49 2007.18,-2155.82 2116.94,-2046.06 P3.20@2711.02,-2046.06
CSI_HSYNC: J7.53 P3.10 | length 1375.6
  Top Layer w8: J7.53@1660.72,-2207.49 1660.72,-2159.28 1973.94,-1846.06 2452.08,-1846.06 2643,-1655.15 2643,-1611.72 P3.10@2708.65,-1546.06
CSI_MCLK: J3.7 J7.55 P3.11 R55.1 U1.5 | length 3347.5
  Top Layer w8: U1.5@1315.17,-1887 1315.17,-2037.89 1375.28,-2098 v1(1612,-2098) ; J3.7@2624.91,-2593.46 2518.46,-2593.46 2400,-2475 2213.28,-2475 2135,-2396.72 2135,-2331.72 2078.28,-2275 v1(1735,-2275) 1715,-2275 1692.22,-2252.22 J7.55@1692.22,-2207.49 1692.22,-2157.78 1983.94,-1866.06 2460.37,-1866.06 2663,-1663.43 2663,-1629.7 2694.7,-1598 2762.96,-1598 P3.11@2811.02,-1646.06
  Bottom Layer w8: v1(1612,-2098) 1677,-2163 1677,-2217 v1(1735,-2275) 1776.04,-2275 R55.1@1782.44,-2268.6
CSI_PIXCLK: J3.8 J7.51 P3.9 R56.1 U1.6 | length 3561.3
  Top Layer w8: U1.6@1315.17,-1837 1262,-1837 1246,-1853 1246,-1997 1367,-2118 1588.46,-2118 1629.23,-2158.77 ; J3.8@2624.91,-2613.14 2508.14,-2613.14 2390,-2495 2205,-2495 2115,-2405 2115,-2340 2080,-2305 v1(1705,-2305) 1675,-2305 1629.23,-2259.23 J7.51@1629.23,-2207.49 1629.23,-2158.77 ; P3.9@2811.02,-1546.06 2761.96,-1497 2695.7,-1497 2623,-1569.7 2623,-1646.86 2443.8,-1826.06 1959.8,-1826.06 1629.23,-2156.63 1629.23,-2158.77
  Bottom Layer w8: v1(1705,-2305) 1730,-2330 R56.1@1782.44,-2330
CSI_VSYNC: J7.57 P3.12 | length 1247.5
  Top Layer w8: J7.57@1723.72,-2207.49 1723.72,-2156.28 1993.94,-1886.06 2468.65,-1886.06 P3.12@2708.65,-1646.06
D0_N: J4.2 R34.2 | length 723.2
  Top Layer w8: R34.2@1926,-805.44 1905,-784.44 1905,-725.46 2156.8,-473.66 2156.8,-248.8 2160.59,-245 J4.2@2160.59,-196.85
D0_P: J4.3 R35.2 | length 723.2
  Top Layer w8: R35.2@1866,-805.44 1887,-784.44 1887,-718 2138.8,-466.2 2138.8,-248.8 2135,-245 J4.3@2135,-196.85
DONE: J6.48
ENET1_CRS_DV: J7.23 R21.2 U2.18 | length 1350.8
  Top Layer w8: U2.18@634.21,-2721.57 v1@634.21,-2645 ; v1@634.61,-2644.61 655,-2624.21 R21.2@655,-2591.56 ; v1(642,-2146.58) 776.58,-2012 1042,-2012 1188.28,-2158.28 J7.23@1188.28,-2207.49
  Bottom Layer w8: v1(634.21,-2644.21) 634.21,-2154.37 v1(642,-2146.58)
ENET1_NINT: J6.52 R14.2 R16.2 U2.21 | length 2396.4
  Top Layer w8: v1(441.56,-2591.56) R14.2@475,-2591.56 R16.2@535,-2591.56 535,-2610 575.16,-2650.16 U2.21@575.16,-2721.57 ; v1(441.56,-2228.44) v1(441.56,-2143.44) ; v1(764,-1821) 791,-1794 815.72,-1794 1116.72,-1493 1557,-1493 1629.23,-1420.77 J6.52@1629.23,-1199.61
  Bottom Layer w8: v1(441.56,-2591.56) v1(441.56,-2228.44) ; v1(441.56,-2143.44) v1(764,-1821)
ENET1_NRST: J6.54 R2.1 | length 2692.4
  Top Layer w8: v1(140.01,-2839.01) 268.43,-2839.01 R2.1@292.44,-2815 ; v1(766,-1857) 767.6,-1857 809.6,-1815 823,-1815 1125,-1513 1567,-1513 1660.72,-1419.28 J6.54@1660.72,-1199.61
  Bottom Layer w8: v1(140.01,-2839.01) 140.01,-2489.99 v1@766,-1864
ENET1_RXD0: J7.27 R22.1 U2.16 | length 1631.9
  Top Layer w8: U2.16@683.43,-2751.1 683.43,-2705.57 748.5,-2640.5 803.5,-2640.5 846,-2598 R22.1@868.44,-2598 ; v2(778,-1966) 1056,-1966 1251.28,-2161.28 J7.27@1251.28,-2207.49
  Bottom Layer w8: v2(721,-2669) 721,-2367 685,-2331 685,-2181 765,-2101 765,-1979 v2(778,-1966)
ENET1_RXD1: J7.25 R20.1 U2.15 | length 1640.1
  Top Layer w8: U2.15@683.43,-2770.79 714.21,-2770.79 738,-2747 v1@738,-2745 ; v1(737,-2746) v1@738,-2745 ; v2@737.5,-2012.5 758,-1992 1052,-1992 1219.78,-2159.78 J7.25@1219.78,-2207.49 ; R20.1@868.44,-2658 825,-2658 v1@738,-2745
  Bottom Layer w8: v1(737,-2746) 737,-2727 692,-2682 692,-2374 660,-2342 660,-2172 737,-2095 v2(737,-2012)
ENET1_RXER: J7.13 R18.2 U2.20 | length 1011.4
  Top Layer w8: U2.20@594.84,-2721.57 v1@594.84,-2630 ; v1(595,-2630) R18.2@595,-2591.56 ; v1(595,-2360) 843,-2112 992.15,-2112 1030.8,-2150.66 J7.13@1030.8,-2207.49
  Bottom Layer w8: v1(595,-2630) v1(595,-2360)
ENET1_TX_CLK: J7.15 U2.9 | length 1262
  Top Layer w8: U2.9@683.43,-2888.9 735.9,-2888.9 v1(742,-2895) ; v2(738.41,-2178.41) 741.59,-2178.41 828,-2092 1000.43,-2092 1062.3,-2153.87 J7.15@1062.3,-2207.49
  Bottom Layer w8: v2(738.41,-2178.41) 740,-2180 711,-2209 711,-2317 748,-2354 748,-2699 766,-2717 766,-2871 v1(742,-2895)
ENET1_TXD0: J7.21 U2.24 | length 1273.2
  Top Layer w8: v1(515,-2320) 670,-2165 670,-2146.86 784.86,-2032 1027,-2032 1156.79,-2161.79 J7.21@1156.79,-2207.49 ; v1(515.46,-2674.54) 516.1,-2675.19 U2.24@516.1,-2721.57
  Bottom Layer w8: v1(515,-2320) 515,-2674.09 v1(515.46,-2674.54)
ENET1_TXD1: J7.19 U2.25 | length 1250.4
  Top Layer w8: v1(485,-2695) 485,-2748.29 U2.25@486.57,-2749.87 ; v1(485,-2390) 690,-2185 690,-2155.15 793.15,-2052 1017,-2052 1125.29,-2160.29 J7.19@1125.29,-2207.49
  Bottom Layer w8: v1(485,-2695) v1(485,-2390)
ENET1_TXEN: J7.17 U2.23 | length 1135.6
  Top Layer w8: U2.23@535.79,-2721.57 535.79,-2694.21 550,-2680 v1(550,-2665) ; v1(550.2,-2365.2) 711.41,-2203.99 711.41,-2165.59 805,-2072 1008.72,-2072 1093.8,-2157.08 J7.17@1093.8,-2207.49
  Bottom Layer w8: v1(550,-2665) v1@550,-2365
ENET2_CRS_DV: D6.2 J6.14 P2.21 | length 1797.5
  Top Layer w8: D6.2@104.88,-2402 82.44,-2402 67.44,-2387 67.44,-2317.56 115,-2270 115,-2196.42 P2.21@165.35,-2146.06 ; v1(748,-1564.32) 829,-1564.32 1030.8,-1362.52 J6.14@1030.8,-1199.61
  Bottom Layer w8: P2.21@165.35,-2146.06 167.22,-2146.06 335,-1978.28 335,-1774.41 545.08,-1564.32 v1(748,-1564.32)
ENET2_RXD0: D4.2 J6.12 P2.22 R84.1 | length 2156.6
  Top Layer w8: P2.22@65.35,-2146.06 20,-2191.42 20,-2487 55,-2522 D4.2@104.88,-2522 ; R84.1@730,-1665.76 695,-1630.76 695,-1566.32 v1(724,-1537.32) 725,-1538.32 825,-1538.32 999.31,-1364.02 J6.12@999.31,-1199.61
  Bottom Layer w8: P2.22@65.35,-2146.06 116.42,-2095 190,-2095 315,-1970 315,-1766.12 543.8,-1537.32 v1(724,-1537.32)
ENET2_RXD1: J6.10 P2.19 | length 1345.1
  Top Layer w8: v1(749,-1512.32) 821,-1512.32 967.81,-1365.51 J6.10@967.81,-1199.61
  Bottom Layer w8: P2.19@165.35,-2046.06 167.22,-2046.06 295,-1918.28 295,-1757.84 541.52,-1511.32 748,-1511.32 v1(749,-1512.32)
ENET2_RXER: J6.4 P2.18 | length 1285.5
  Top Layer w8: v1(725,-1433.32) 810,-1433.32 873.32,-1370 J6.4@873.32,-1199.61
  Bottom Layer w8: P2.18@65.35,-1946.06 116.42,-1895 190,-1895 235,-1850 235,-1732.99 534.66,-1433.32 v1(725,-1433.32)
ENET2_TX_CLK: J6.6 P2.17 | length 1217
  Top Layer w8: v1(749,-1460.32) 813,-1460.32 904.82,-1368.5 J6.6@904.82,-1199.61
  Bottom Layer w8: P2.17@165.35,-1946.06 167.22,-1946.06 255,-1858.28 255,-1741.27 536.95,-1459.32 748,-1459.32 v1(749,-1460.32)
ENET2_TXD0: D8.2 J6.18 P2.23 | length 1727.6
  Top Layer w8: D8.2@104.88,-2342 104.88,-2321.54 P2.23@180.35,-2246.06 ; v1(749,-1616.32) 837,-1616.32 1093.8,-1359.53 J6.18@1093.8,-1199.61
  Bottom Layer w8: P2.23@167.22,-2246.06 375,-2038.28 375,-1790.98 547.65,-1618.32 747,-1618.32 v1(749,-1616.32) ; P2.23@180.35,-2246.06 P2.23@182.22,-2246.06
ENET2_TXD1: D5.2 J6.16 P2.24 | length 1947.1
  Top Layer w8: P2.24@65.35,-2246.06 45,-2266.42 45,-2432 75,-2462 D5.2@104.88,-2462 ; P2.24@72.85,-2253.56 P2.24@80.35,-2246.06 ; v1(724,-1590.32) 833,-1590.32 1062.3,-1361.02 J6.16@1062.3,-1199.61
  Bottom Layer w8: P2.24@65.35,-2246.06 116.42,-2195 190,-2195 355,-2030 355,-1782.69 547.37,-1590.32 v1(724,-1590.32)
ENET2_TXEN: J6.8 P2.20 | length 1414.4
  Top Layer w8: v1(725,-1485.32) 726,-1486.32 817,-1486.32 936.32,-1367.01 J6.8@936.32,-1199.61
  Bottom Layer w8: P2.20@65.35,-2046.06 116.42,-1995 190,-1995 275,-1910 275,-1749.55 539.23,-1485.32 v1(725,-1485.32)
ENET_MDC: J6.20 R15.1 U2.12 | length 1969.5
  Top Layer w8: U2.12@683.43,-2829.84 v2@789.16,-2829.84 ; v2(793,-2826) v2@789.16,-2829.84 ; R15.1@868.44,-2838 860.28,-2829.84 v2@789.16,-2829.84 ; v2(930,-1563.32) 930,-1555 1125.29,-1359.71 J6.20@1125.29,-1199.61
  Bottom Layer w8: v2@793,-2822.84 793,-2711 775.15,-2693.15 775.15,-2279.85 882,-2173 882,-1611.32 v2(930,-1563.32)
ENET_MDIO: J6.22 R13.1 U2.11 | length 2020.4
  Top Layer w8: U2.11@683.43,-2849.53 728.13,-2849.53 ; 728.13,-2849.84 777.84,-2849.84 787,-2859 v1(820,-2859) 859,-2898 R13.1@868.44,-2898 ; v1(968,-1564) 968,-1555 1156.79,-1366.21 J6.22@1156.79,-1199.61
  Bottom Layer w8: v1(820,-2859) 820,-2706 800,-2686 800,-2290 909,-2181 909,-1623 v1(968,-1564)
ETH1_RX+: J1.3 U2.5 | length 600.8
  Top Layer w8: J1.3@527.83,-3271.09 578.91,-3220 703,-3220 727,-3196 727,-3149 705.53,-3127.53 669.53,-3127.53 594.84,-3052.84 U2.5@594.84,-2918.43
  Bottom Layer w8: J1.3@527.83,-3271.09 J1.3@544.91,-3271.09
ETH1_RX-: J1.6 U2.4 | length 287.4
  Top Layer w8: U2.4@575.16,-2918.43 575.16,-3063.42 J1.6@675.83,-3164.09
ETH1_TX+: J1.1 U2.7 | length 994.1
  Top Layer w8: J1.1@427.83,-3271.09 507.74,-3351 768,-3351 852,-3267 852,-3132 800,-3080 692,-3080 634.21,-3022.21 U2.7@634.21,-2918.43
ETH1_TX-: J1.2 U2.6 | length 1002.9
  Top Layer w8: J1.2@477.83,-3171.09 477.83,-3288.83 518,-3329 756,-3329 828,-3257 828,-3144 789,-3105 684,-3105 614.53,-3035.53 U2.6@614.53,-2918.43
GEN_3V3: C9.1 C10.1 C19.1 C21.1 C22.1 C28.2 D1.1 FB1.2 J1.9 J1.12 J7.79 P1.4 P3.21 P3.22 P5.1 Q13.3 R1.1 R3.1 R4.1 R5.1 R6.1 R8.1 R13.2 R15.2 R16.1 R19.2 R25.1 R37.1 R38.1 R39.1 R40.1 R41.1 R42.1 R43.1 R44.1 R50.1 R55.2 R56.2 R60.2 R61.2 R62.2 R63.2 R87.2 R98.1 R99.1 R100.1 R143.1 R144.1 R145.1 R146.1 R147.1 U2.17 U3.16 | length 17066.8
  Top Layer w8: R5.1@292.44,-2755 R6.1@292.44,-2695 ; R8.1@292.44,-2575 292.44,-2528.44 327.88,-2493 518,-2493 535,-2510 R16.1@535,-2536.44 ; R15.2@923.56,-2838 R13.2@923.56,-2898 v1(1002,-2898) ; R19.2@923.56,-2718 v1(1002,-2718) ; R3.1@1147,-1601.44 R1.1@1215,-1601.44 1215,-1573 1235,-1553 1326.55,-1553 D1.1@1364.37,-1590.82 ; v1(1722.44,-3412) R145.1@1786.44,-3348 R144.1@1786.44,-3288 ; 2142,-2667 v1(2142,-2582) ; v1(2287,-3418) 2287,-3442 2346,-3501 R50.1@2355.44,-3501 ; 2301,-2666 v1(2301,-2581) ; v1(2755,-2891) v1(2835,-2811)
  Top Layer w10: R60.2@104.88,-2592 R61.2@104.88,-2652 R62.2@104.88,-2712 R63.2@104.88,-2772 104.88,-2832.88 105,-2833 v1(105,-2869) ; v1(178,-2935) R4.1@292.44,-2935 ; U2.17@653.9,-2721.57 653.9,-2686.1 667.5,-2672.5 ; R100.1@1637.44,-3780 R143.1@1637.44,-3659 R99.1@1637.44,-3599 R147.1@1637.44,-3539 R146.1@1637.44,-3479 v1(1637.44,-3415) ; v1(1660,-2575) 1661,-2574 v1(1850,-2574) 1884,-2574 1980,-2670 v1(2010,-2670) ; v4(1950,-185) 2022,-257 R37.1@2022,-395.44
  Top Layer w15: 667.5,-2672.5 715,-2625 C9.1@715,-2591.56 C10.1@775,-2591.56 795.44,-2591.56 v1(848,-2539)
  Top Layer w20: v7(437,-3106) 509,-3106 535,-3080 FB1.2@535,-3056.56 ; D1.1@1364.37,-1590.82 1416.55,-1643 v1(1664,-1643) ; R87.2@1621.56,-699 1658,-735.44 v1(1658,-856) ; v1(2010,-2670) 2435,-2670 v1(2465,-2700)
  Top Layer w25: v6(2560,-2149.61) P3.22@2707.09,-2149.61 P3.21@2807.09,-2149.61
  Top Layer w30: J7.79@2080,-2207.49 v6@2109.93,-2207.49
  Top Layer w40: R87.2@1627,-693.56 1627,-612 Q13.3@1638,-601 1638,-257 1710,-185 v4(1950,-185) ; v4(2323,-218) 2432,-327 P5.1@2805,-327 ; v4(2560,-925) 2677,-808 2677,-629 2702,-604 2702,-328
  Bottom Layer w8: 261,-2725 v1(292,-2725) ; R39.1@1752,-2614.44 1752,-2573 v1(1754,-2575) ; R56.2@1837.56,-2330 R55.2@1837.56,-2268.6 1898.6,-2207.56 v6(2110,-2207.56) ; v1(1850,-2574) 1852,-2572 R40.1@1852,-2614.44 R44.1@1912,-2614.44 ; R41.1@2142,-2614.44 v1(2142,-2582) ; R42.1@2301,-2612.44 v1(2301,-2581) ; R43.1@2381,-2612.44 2482.56,-2612.44 ; 2462,-2878 2742,-2878 v1(2755,-2891) ; R25.1@2823.96,-2776 2835,-2787.04 v1(2835,-2811)
  Bottom Layer w10: v1(105,-2869) 178,-2869 ; J1.9@342,-3714 405,-3777 800.65,-3777 J1.12@863.65,-3714 1124,-3453.65 1124,-3412 ; R38.1@1652,-2614.44 1660,-2606.44 v1(1660,-2575) ; v1(2010,-2670) v1@2010.44,-2669.56
  Bottom Layer w15: C21.1@1654.56,-920 v1@1654.56,-859.44 ; v1(2010,-2670) 2046.56,-2670 C19.1@2047,-2669.56 ; P1.4@2047,-2749.78 C19.1@2047,-2684.56
  Bottom Layer w20: v1(292,-2528) 260,-2560 260,-2745 178,-2827 178,-2869 v1(178,-2935) 178,-3056 228,-3106 v7(437,-3106) ; v1(848,-2539) 967,-2539 1002,-2574 1002,-3106 ; v1(1658,-856) C22.1@1829.44,-856 ; v1(1664,-1643) 1663,-1642 2025,-1642 2110,-1727 v6(2110,-2207.56)
  Bottom Layer w30: v7(437,-3106) 1002,-3106 ; v6(2110,-2207.56) C28.2@2165,-2207.56 2547.44,-2207.56
  Bottom Layer w40: 1002,-3106 1002,-3290 1124,-3412 v1(1722.44,-3412) 2376,-3412 2462,-3326 2462,-2703 v1(2465,-2700) 2485,-2680 2485,-2363.08 2560,-2288.08 v6(2560,-2149.61) v4(2560,-925) ; v4(1950,-185) 1980,-185 2030,-135 2240,-135 v4(2323,-218)
GEN_5V: C11.2 C27.1 J2.1 J3.50 J3.51 J3.52 J3.53 J3.54 Q2.3 Q12.3 R24.1 R85.1 | length 6796.6
  Top Layer w10: J3.54@2624.91,-3518.65 2687.35,-3518.65 2713.72,-3492.28 2713.72,-3479.28 J3.52@2624.91,-3479.28 ; J3.53@2624.91,-3498.97 2687.03,-3498.97 v4@2705,-3481 ; J3.51@2624.91,-3459.6 2686.6,-3459.6 v4@2699,-3472 ; J3.50@2624.91,-3439.91 2687.91,-3439.91 2715,-3467 v4(2715,-3478)
  Top Layer w15: Q2.3@2343,-645 2343,-625 2488,-480 J2.1@2495,-480 ; R24.1@2522.56,-830 v1(2565,-830)
  Top Layer w50: R85.1@865,-720 892,-693 Q12.3@892,-604 892,-503 935,-460 935,-297 1166,-66 v4@1657.5,-66
  Bottom Layer w15: v1(2565,-830) 2696,-830
  Bottom Layer w50: v4(1657.5,-67.5) 1903,-313 2577,-313 2696,-432 2696,-900 2625,-971 2625,-2754 2705,-2834 2778,-2834 2836.02,-2892.02 2836.02,-3416.98 2775,-3478 v4(2715,-3478) ; J2.1@2495,-480 2495,-320